# EAGLE board 4brar07_Buck_Boost_Module_With_Led_Matrix (EAGLE 9.6.2)
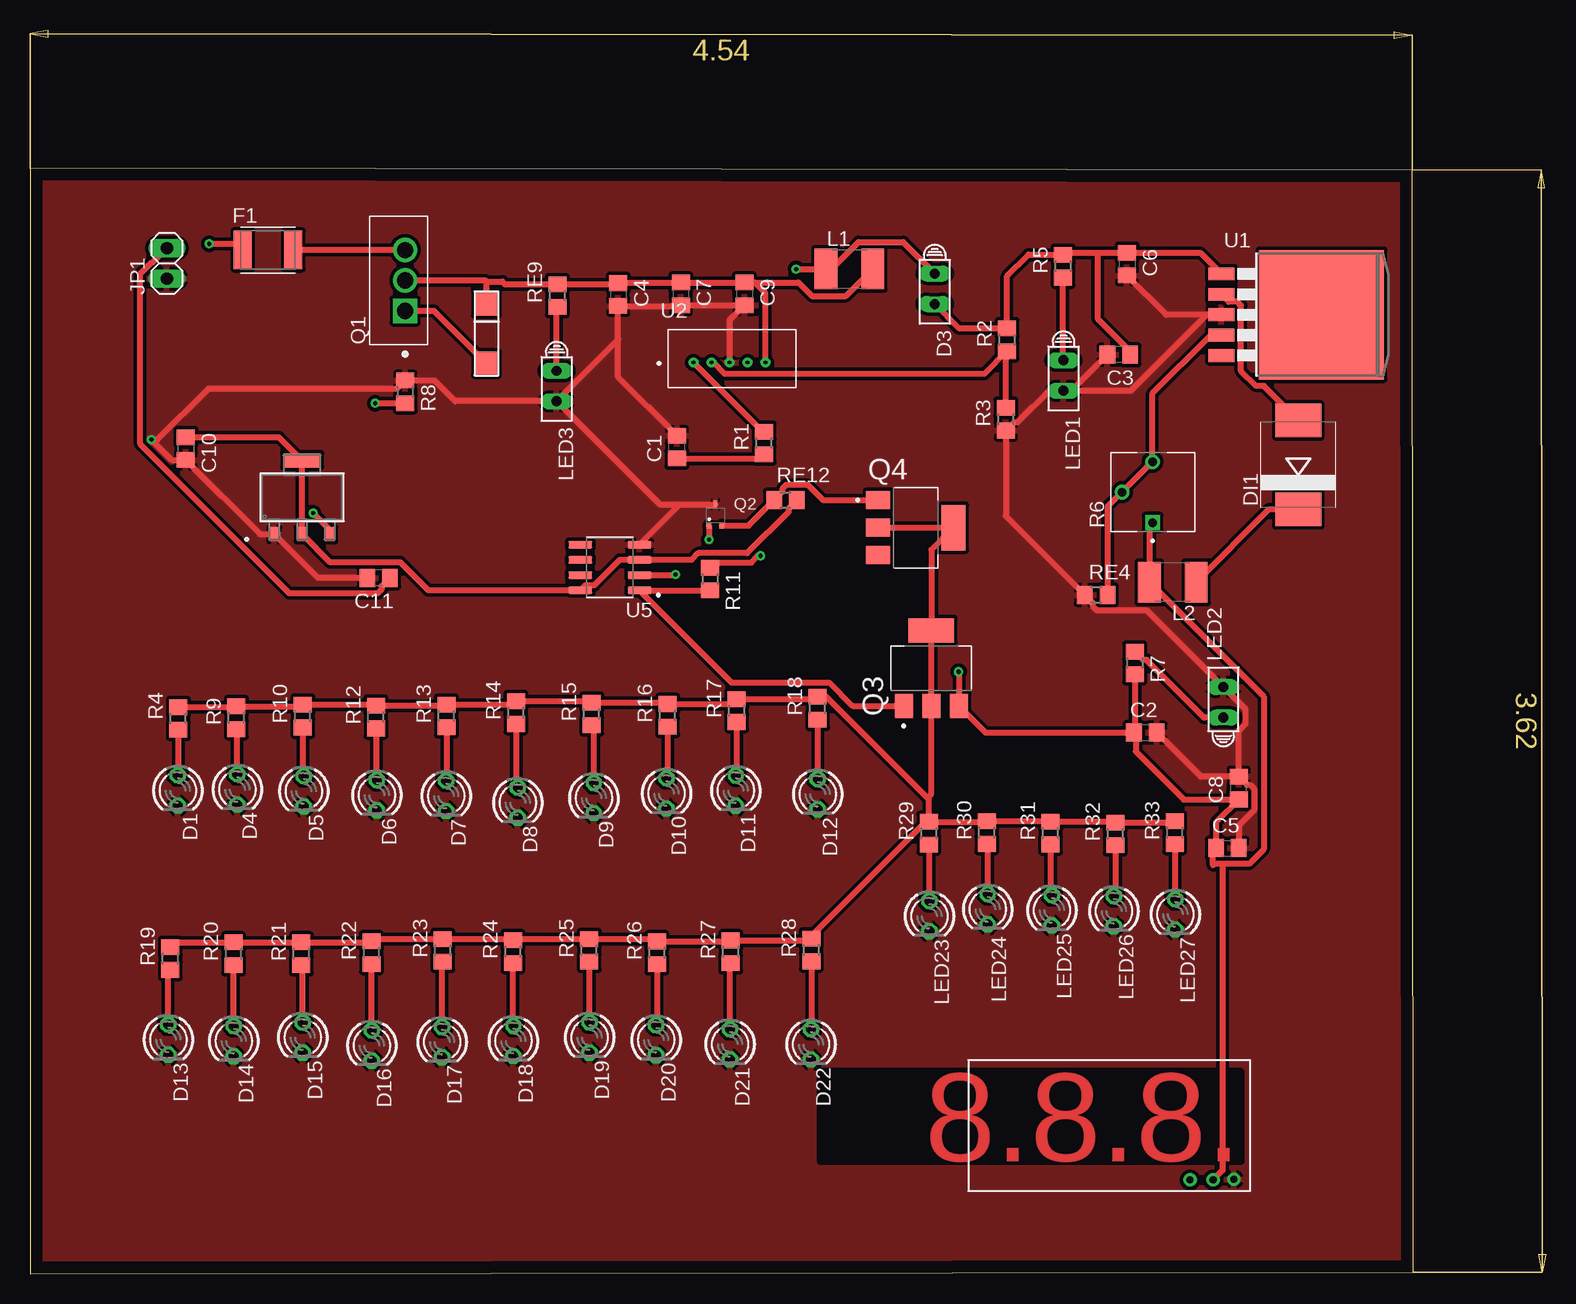
[diagram p0: board, top side]
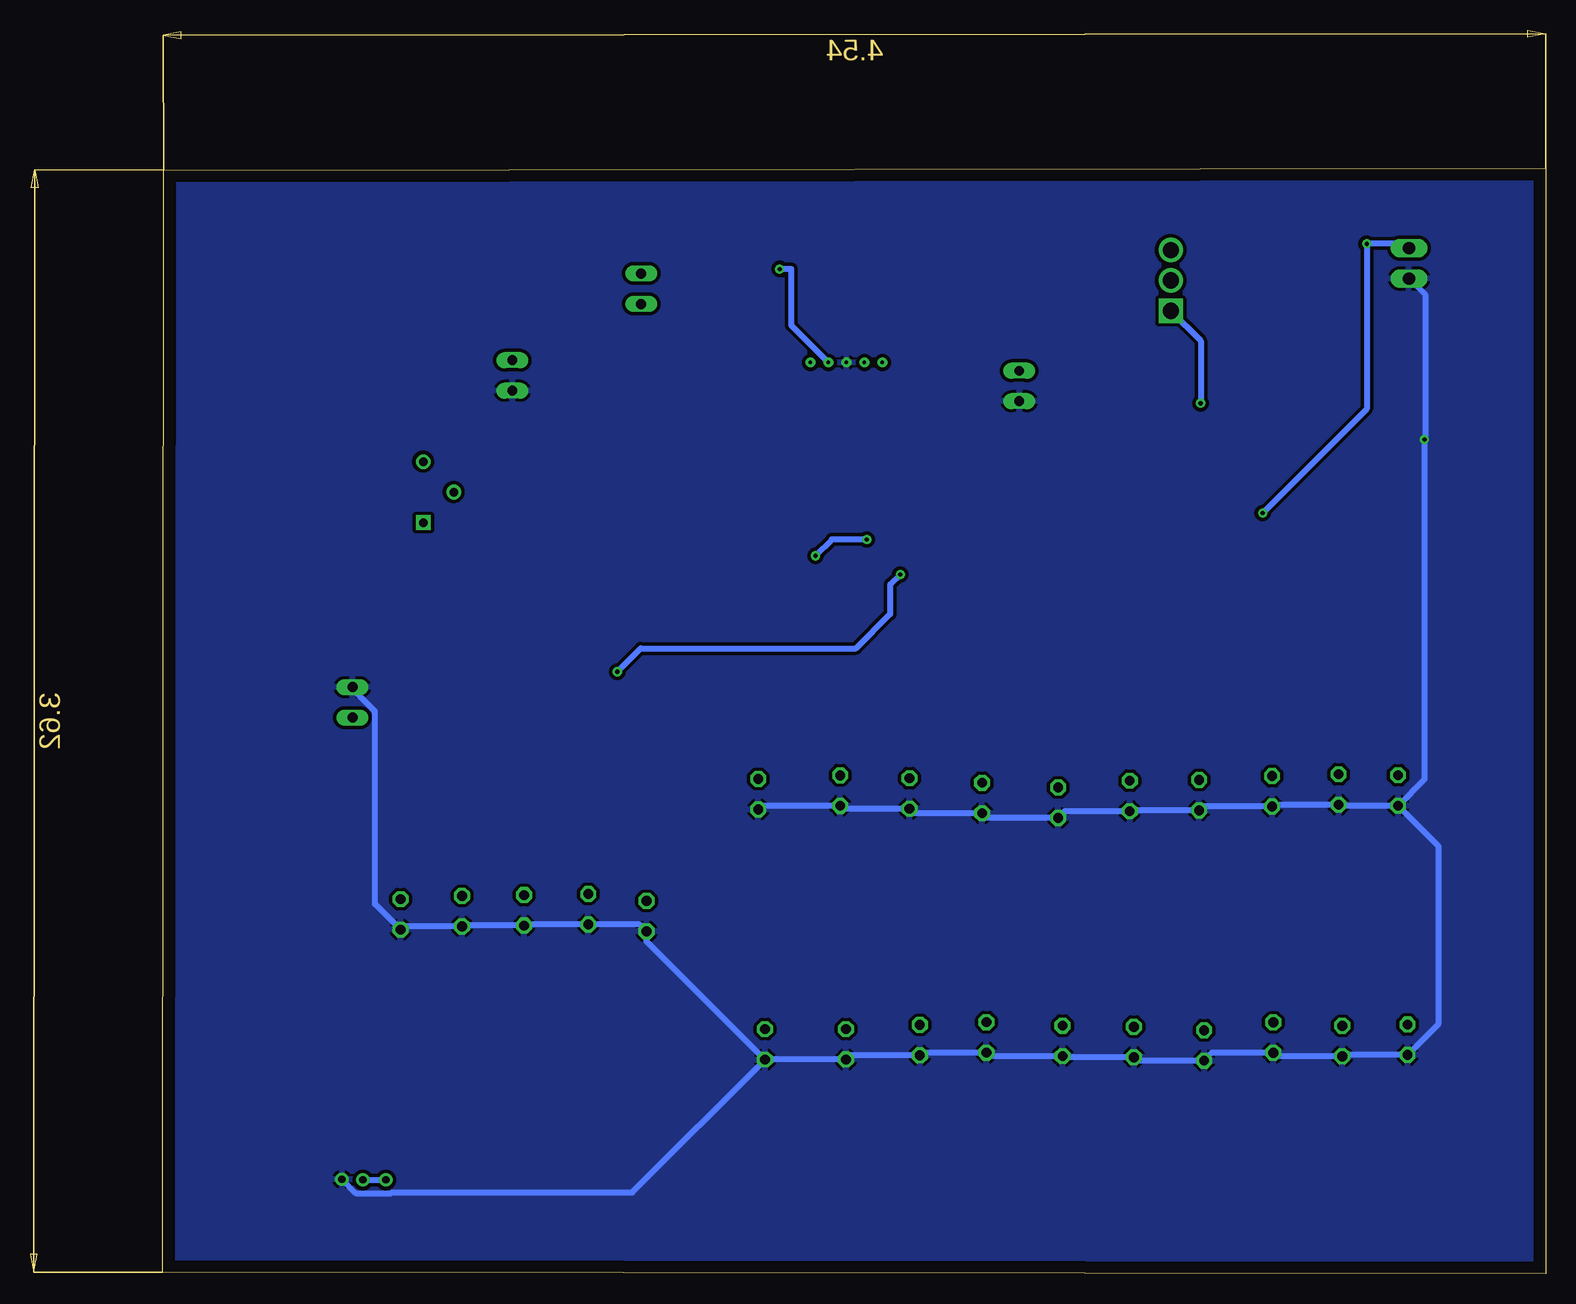
[diagram p1: board, bottom side, seen from below]

Size 115.32 x 92.16 mm. Coordinates in mm from the lower left corner, seen from the top.
Outline: 0,0 115.32,0.13 115.23,92.01 0,92.16 0,0
Copper layers (1*16): Top 0.035mm / dielectric 1.5mm / Bottom 0.035mm
Design rules "default *": minimum track width 6mil, minimum drill 0.3mm, track to track 0.3mm, track to pad 0.3mm, pad to pad 0.3mm, via to via 0.3mm, smd to smd 0.3mm, copper to edge 40mil, drill to drill 6mil, minimum pad ring 10mil, minimum via ring 8mil, stop-mask expansion 4mil, vias tented up to drill 0mil, thermal gap 10mil
Net classes: 0 default: width 0.25 mm, drill 0.3 mm, clearance 0.3 mm; 1 Power: width 0.5 mm, drill 0.3 mm, clearance 0.3 mm

## Footprints (pad centres in the part's own frame; a part is rotated, then mirrored left to right if it is on the bottom)
C0805 = smd 1.3 x 1.5: 1 -0.95,0; 2 0.95,0
LED3MM = drill 0.813 octagon: A -1.27,0; K 1.27,0
HLMP6 = drill 0.813 long: A -1.27,0; K 1.27,0
SMC = smd 2.8 x 3.8: A 3.7,0; C -3.7,0
VOLTMETER = drill 0.6: GND 22.15,0.96; MP 18.49,0.92; VCC 20.41,0.92
FUSER_MF-MSMF010-2 = smd 1.5 x 3.2: 1 -2.1,0; 2 2.1,0
1X02 = drill 1.016 long: 1 -1.27,0; 2 1.27,0
L1812 = smd 1.9 x 3.4: 1 -1.95,0; 2 1.95,0
TO254P1067X483X2286-3 = drill 1.34 square: 1 0,0 | drill 1.34: 2 2.54,0; 3 5.08,0
SOT666 = smd 0.375 x 0.5: 1 -0.537,-0.85; 3 0.538,-0.85 | smd 0.3 x 0.65: 5 0,0.925
SOT230P700X175-4N = smd 2 x 1.5: 1 -3.15,2.3; 2 -3.15,0; 3 -3.15,-2.3 | smd 2 x 3.8: 4 3.15,0
R0805 = smd 1.3 x 1.5: 1 -0.95,0; 2 0.95,0
TRIM_3362P-1-253LF = drill 0.714 square: 1 -2.54,0 | drill 0.714: 2 0,2.54; 3 2.54,0
TO263-5 = smd 1.067 x 2.159: 1 -3.404,-5.791; 2 -1.702,-5.791; 3 0,-5.791; 4 1.702,-5.791; 5 3.404,-5.791 | smd 10.8 x 10.41: 6 0,2.54
VREG_LM2577T-ADJ/NOPB = drill 0.3: P$1 0.18,0.04; P$2 1.68,0.04; P$3 3.18,0.04; P$4 4.68,0.04; P$5 6.18,0.04
SOT223_AMS1117-5.0_ADS-L = smd 0.838 x 1.168: 1 -2.311,-3.068; 2 0,-3.068; 3 2.311,-3.068 | smd 3.099 x 1.168: 4 0,3.068
SOIC127P599X175-8N = smd 1.97 x 0.6: 1 -2.47,1.905; 2 -2.47,0.635; 3 -2.47,-0.635; 4 -2.47,-1.905; 5 2.47,-1.905; 6 2.47,-0.635; 7 2.47,0.635; 8 2.47,1.905
ZMM12 = smd 2 x 2: 1 -2.5,0; 2 2.5,0

## Placement (x,y rotation side)
C1  [C0805]  53.93,68.92 90 top
C2  [C0805]  92.97,45.12 0 top
C3  [C0805]  90.76,76.62 180 top
C4  [C0805]  49.04,81.63 270 top
C5  [C0805]  99.81,35.48 0 top
C6  [C0805]  91.44,84.17 270 top
C7  [C0805]  54.25,81.68 270 top
C8  [C0805]  100.75,40.49 90 top
C9  [C0805]  59.56,81.68 270 top
C10  [C0805]  12.99,68.79 270 top
C11  [C0805]  29.06,58.01 180 top
D1  TLLG4400  [LED3MM]  12.32,40.29 270 top
D3  HLMP6  [HLMP6]  75.42,82.11 270 top
D4  TLLG4400  [LED3MM]  17.28,40.37 270 top
D5  TLLG4400  [LED3MM]  22.82,40.22 270 top
D6  TLLG4400  [LED3MM]  28.91,39.9 270 top
D7  TLLG4400  [LED3MM]  34.69,39.83 270 top
D8  TLLG4400  [LED3MM]  40.66,39.27 270 top
D9  TLLG4400  [LED3MM]  47,39.66 270 top
D10  TLLG4400  [LED3MM]  53.05,40.04 270 top
D11  TLLG4400  [LED3MM]  58.83,40.28 270 top
D12  TLLG4400  [LED3MM]  65.66,39.98 270 top
D13  TLLG4400  [LED3MM]  11.53,19.51 270 top
D14  TLLG4400  [LED3MM]  16.98,19.4 270 top
D15  TLLG4400  [LED3MM]  22.73,19.69 270 top
D16  TLLG4400  [LED3MM]  28.49,19.03 270 top
D17  TLLG4400  [LED3MM]  34.35,19.32 270 top
D18  TLLG4400  [LED3MM]  40.29,19.41 270 top
D19  TLLG4400  [LED3MM]  46.64,19.7 270 top
D20  TLLG4400  [LED3MM]  52.19,19.48 270 top
D21  TLLG4400  [LED3MM]  58.35,19.13 270 top
D22  TLLG4400  [LED3MM]  65.1,19.12 270 top
DI1  SS56SMC  [SMC]  105.73,67.43 90 top
DISP1  VOLTMETER  [VOLTMETER]  78.21,6.91 0 top
F1  MF-MSMF010-2  [FUSER_MF-MSMF010-2]  19.84,85.35 0 top
JP1  [1X02]  11.41,84.24 90 top
L1  [L1812]  68.3,83.77 0 top
L2  [L1812]  95.26,57.65 180 top
LED1  HLMP6  [HLMP6]  86.15,74.89 270 top
LED2  HLMP6  [HLMP6]  99.48,47.64 90 top
LED3  HLMP6  [HLMP6]  43.9,74.01 270 top
LED23  TLLG4400  [LED3MM]  74.97,29.81 270 top
LED24  TLLG4400  [LED3MM]  79.83,30.39 270 top
LED25  TLLG4400  [LED3MM]  85.18,30.3 270 top
LED26  TLLG4400  [LED3MM]  90.35,30.23 270 top
LED27  TLLG4400  [LED3MM]  95.47,29.96 270 top
Q1  FQP47P06  [TO254P1067X483X2286-3]  31.27,80.27 90 top
Q2  BC847BV_115  [SOT666]  57.14,63.21 0 top
Q3  NTF5P03T3G  [SOT230P700X175-4N]  75.14,50.49 90 top
Q4  NTF5P03T3G  [SOT230P700X175-4N]  73.84,62.2 0 top
R1  [R0805]  61.19,69.25 90 top
R2  [R0805]  81.45,77.86 90 top
R3  [R0805]  81.35,71.24 90 top
R4  [R0805]  12.36,46.29 90 top
R5  [R0805]  86.12,83.99 90 top
R6  3362P-1-253LF  [TRIM_3362P-1-253LF]  93.58,65.16 90 top
R7  [R0805]  92.09,50.92 270 top
R8  [R0805]  31.28,73.52 270 top
R9  [R0805]  17.2,46.36 90 top
R10  [R0805]  22.73,46.49 90 top
R11  [R0805]  56.68,57.92 270 top
R12  [R0805]  28.84,46.41 90 top
R13  [R0805]  34.71,46.5 90 top
R14  [R0805]  40.51,46.78 90 top
R15  [R0805]  46.82,46.67 90 top
R16  [R0805]  53.15,46.55 90 top
R17  [R0805]  58.91,46.95 90 top
R18  [R0805]  65.65,47.14 90 top
R19  [R0805]  11.7,26.28 90 top
R20  [R0805]  16.97,26.68 90 top
R21  [R0805]  22.62,26.68 90 top
R22  [R0805]  28.47,26.77 90 top
R23  [R0805]  34.41,26.96 90 top
R24  [R0805]  40.26,26.86 90 top
R25  [R0805]  46.61,26.96 90 top
R26  [R0805]  52.27,26.76 90 top
R27  [R0805]  58.41,26.84 90 top
R28  [R0805]  65.14,26.99 90 top
R29  [R0805]  74.93,36.73 90 top
R30  [R0805]  79.76,36.78 90 top
R31  [R0805]  85.07,36.74 90 top
R32  [R0805]  90.47,36.67 90 top
R33  [R0805]  95.43,36.77 90 top
RE4  [R0805]  88.87,56.6 0 top
RE9  [R0805]  43.97,81.54 90 top
RE12  [R0805]  62.98,64.49 0 top
U1  LM2596S  [TO263-5]  105.11,79.95 270 top
U2  LM2577T-ADJ  [VREG_LM2577T-ADJ/NOPB]  55.13,75.93 0 top
U4  AMS1117-5.0SOT223_AMS1117-5.0_ADS-L  [SOT223_AMS1117-5.0_ADS-L]  22.68,64.73 0 top
U5  LM358DR  [SOIC127P599X175-8N]  48.34,58.88 180 top
U$1  ZMM12  [ZMM12]  38.06,78.38 90 top

## Library data of the parts
C1-C11 = rcl; SPICEPREFIX: C
D1 D4-D22 LED23-LED27 = led; MF: VISHAY SEMICONDUCTOR; OC_FARNELL: 1612435
D3 LED1-LED3 = display-hp; MF: AGILENT TECHNOLOGIES; MPN: HLMP-6500; OC_FARNELL: 1652490; OC_NEWARK: 40K0088
DI1 = SS56; AVAILABILITY: In Stock; CHECK_PRICES: https://www.snapeda.com/parts/SS56/MDD/view-part/?ref=eda; DESCRIPTION: Diode Schottky 60 V 5A Surface Mount SMA; MF: MDD; MP: SS56; PACKAGE: None; PRICE: None; SNAPEDA_LINK: https://www.snapeda.com/parts/SS56/MDD/view-part/?ref=snap
DISP1 = voltmeter; DISP1: DISP1
F1 = MF-MSMF010-2; AVAILABILITY: In Stock; CHECK_PRICES: https://www.snapeda.com/parts/MF-MSMF010-2/Bourns/view-part/?ref=eda; DESCRIPTION: Fuse Resettable 40A Sz 4532 0.186x0.134x0.043 SMT 60VDC DCR 0.7 Ohms PCB | Bourns MF-MSMF010-2; MF: Bourns; MP: MF-MSMF010-2; PACKAGE: 1812 Bourns; PRICE: None; SNAPEDA_LINK: https://www.snapeda.com/parts/MF-MSMF010-2/Bourns/view-part/?ref=snap
JP1 = pinhead
L1 L2 = rcl; SPICEPREFIX: L
Q1 = FQP47P06; AVAILABILITY: In Stock; CHECK_PRICES: https://www.snapeda.com/parts/FQP47P06/Onsemi/view-part/?ref=eda; DESCRIPTION: P-Channel 60 V 47A (Tc) 160W (Tc) Through Hole TO-220-3; MF: ON Semiconductor; MP: FQP47P06; PACKAGE: TO-220-3 ON; PRICE: None; SNAPEDA_LINK: https://www.snapeda.com/parts/FQP47P06/Onsemi/view-part/?ref=snap
Q2 = BC847BV_115
Q3 Q4 = NTF5P03T3G
R1-R5 R7-R33 RE4 RE9 RE12 = rcl; SPICEPREFIX: R
R6 = 3362P-1-253LF; AVAILABILITY: In Stock; CHECK_PRICES: https://www.snapeda.com/parts/3362P-1-253LF/Bourns/view-part/?ref=eda; DESCRIPTION: 1/4 Sq, Thru-Hole, TRIMMER, 25 Kilohms, Cermet, Single Turn | Bourns 3362P-1-253LF; MF: Bourns; MP: 3362P-1-253LF; PACKAGE: 3362P-1 Bourns Inc.; PRICE: None; SNAPEDA_LINK: https://www.snapeda.com/parts/3362P-1-253LF/Bourns/view-part/?ref=snap
U1 = national-semiconductor; MF: NATIONAL SEMICONDUCTOR; MPN: LM2596S-ADJ/NOPB; OC_FARNELL: 9494367; OC_NEWARK: 41K3842
U2 = LM2577T-ADJ_NOPB
U4 = AMS1117-5.0; COPYRIGHT: Copyright (C) 2025 Ultra Librarian. All rights reserved.; MANUFACTURER_NAME: Advanced Monolithic Systems; MANUFACTURER_PART_NUMBER: AMS1117-5.0
U5 = LM358DR; AVAILABILITY: In Stock; CHECK_PRICES: https://www.snapeda.com/parts/LM358DR/Rohm/view-part/?ref=eda; DESCRIPTION: Standard (General Purpose) Amplifier 2 Circuit 8-SOIC; MF: Rohm Semiconductor; MP: LM358DR; PACKAGE: None; PRICE: None; SNAPEDA_LINK: https://www.snapeda.com/parts/LM358DR/Rohm/view-part/?ref=snap
U$1 = ZMM12

## Nets
4: D3.A L1.1 U2.P$4
+5V [Power]: C10.1 RE12.2 U4.2 U4.4 U5.3 U5.8
FINAL [Power]: Q3.2 Q3.4 Q4.2 Q4.4 R4.2 R9.2 R10.2 R12.2 R13.2 R14.2 R15.2 R16.2 R17.2 R18.2 R19.2 R20.2 R21.2 R22.2 R23.2 R24.2 R25.2 R26.2 R27.2 R28.2 R29.2 R30.2 R31.2 R32.2 R33.2
GND [Power]: C1.2 C2.2 C3.2 C4.2 C5.2 C6.2 C7.2 C8.2 C9.2 C10.2 C11.2 D1.K D4.K D5.K D6.K D7.K D8.K D9.K D10.K D11.K D12.K D13.K D14.K D15.K D16.K D17.K D18.K D19.K D20.K D21.K D22.K DISP1.GND JP1.1 LED1.K LED2.K LED3.K LED23.K LED24.K LED25.K LED26.K LED27.K Q2.5 R3.1 R8.1 RE4.1 U1.3 U2.P$3 U4.1 U5.4
N$1: D1.A R4.1
N$2: F1.2 Q1.3
N$3: C4.1 C7.1 C9.1 L1.2 Q1.2 RE9.2 U2.P$5 U$1.2
N$4: Q1.1 R8.2 U$1.1
N$5: D4.A R9.1
N$6: LED3.A RE9.1
N$7: C3.1 C6.1 D3.K R2.2 R5.2 U1.1
N$8: C1.1 R1.1
N$9: R1.2 U2.P$1
N$11: D5.A R10.1
N$12: D22.A R28.1
N$13: LED1.A R5.1
N$14: D21.A R27.1
N$15: Q2.1 R11.1
N$16: D20.A R26.1
N$17: Q2.3 Q4.1 RE12.1
N$18: DI1.A U1.2
N$19: DI1.C L2.1
N$20: D19.A R25.1
N$21: R6.2 R6.3 RE4.2 U1.4
N$22: LED2.A R7.1
N$23: D18.A R24.1
N$24: Q3.1 R11.2 U5.1
N$25: D6.A R12.1
N$26: LED23.A R29.1
N$27: LED24.A R30.1
N$28: LED25.A R31.1
N$29: LED26.A R32.1
N$30: LED27.A R33.1
N$31: D17.A R23.1
N$32: D16.A R22.1
N$33: D15.A R21.1
N$34: D14.A R20.1
N$35: D13.A R19.1
N$36: D7.A R13.1
N$38: D12.A R18.1
N$39: D11.A R17.1
N$40: D10.A R16.1
N$41: D9.A R15.1
N$42: D8.A R14.1
N$43: R2.1 R3.2 U2.P$2
OUT: C2.1 C5.1 C8.1 DISP1.MP DISP1.VCC L2.2 Q3.3 R6.1 R7.2 U5.2
VCC [Power]: C11.1 F1.1 JP1.2 U4.3

## Tracks (layer width: path | path; a pad name or v marks a point on that pad's centre or on a via)
4  (via drill 0.35)
  Top 0.5: D3.A 72.78,86.02 69.07,86.02 66.82,83.77 L1.1 v63.87,83.76
  Bottom 0.5: U2.P$4 62.89,79.05 62.89,83.76 v63.87,83.76
+5V
  Top 0.5: C10.1 20.74,69.74 U4.4 U4.2 25.03,59.31 30.89,59.31 33.22,56.98 U5.8 46.29,57.4 47.04,57.4 49.16,59.52 U5.3 55.15,59.52 55.7,60.07 59.79,60.07 63.23,63.51 63.23,63.79 RE12.2
FINAL
  Top 0.5: R29.2 79.71,37.68 R30.2 85.03,37.73 R31.2 90.4,37.69 R32.2 95.33,37.62 R33.2 | R19.2 12.1,27.63 R20.2 R21.2 28.38,27.63 R22.2 28.66,27.91 R23.2 40.16,27.91 R24.2 40.36,27.91 R25.2 52.07,27.91 R26.2 58.33,27.71 R27.2 64.99,27.79 R28.2 65.14,28.17 74.65,37.68 R29.2 | R4.2 17.13,47.24 R9.2 22.6,47.31 R10.2 28.76,47.44 R12.2 34.62,47.36 R13.2 40.23,47.45 R14.2 46.71,47.73 R15.2 53.03,47.62 R16.2 58.51,47.5 R17.2 65.46,47.9 R18.2 65.76,48.2 66.27,48.2 74.93,39.54 R29.2 | R29.2 74.93,39.79 75.14,40 Q3.2 Q3.4 75.14,60.35 Q4.4 Q4.2
GND  (via drill 0.35)
  Top 0.5: C11.2 24.02,58.01 U4.1 19.17,61.66 C10.2 11.82,67.84 v10.12,69.54 10.61,69.54 14.84,73.77 30.58,73.77 R8.1 33.72,74.47 35.45,72.74 LED3.K | C5.2 100.76,37.37 102.05,38.66 102.05,40.42 101.73,40.74 101.45,40.74 C8.2 | LED1.K 86.09,73.68 85.02,73.68 82.33,70.99 82.05,70.99 R3.1 81.35,63.17 RE4.1 88.62,55.9 88.62,55.62 88.94,55.3 93.09,55.3 LED2.K 101.35,47.04 101.35,45.87 100.75,45.27 C8.2 | U1.3 98.1,79.95 | 98.1,79.95 94.71,79.95 C6.2 | C3.2 86.81,73.62 LED1.K | LED1.K 91.77,73.62 98.1,79.95 | LED3.K 49.04,77.88 | 49.04,77.88 C4.2 54.2,80.68 C7.2 C9.2 58.31,79.48 U2.P$3 | C1.2 49.04,74.76 49.04,77.88 | U5.4 54.16,64.14 | C8.2 97.6,41.44 C2.2 | LED3.K 52.51,64.14 54.16,64.14 | 54.16,64.14 Q2.5
  Bottom 0.5: JP1.1 10.07,81.63 10.07,69.54 v10.12,69.54 10.12,41.22 D1.K | D1.K 17.2,39.02 D4.K 22.67,39.1 D5.K 28.59,38.95 D6.K 34.62,38.63 D7.K 40.1,38.56 D8.K 46.61,38 D9.K 52.67,38.39 D10.K 58.59,38.77 D11.K 65.36,39.01 D12.K | D22.K D21.K 58,18.21 D20.K 51.97,18.43 D19.K 46.35,18.14 D18.K 40.2,18.05 D17.K 34.06,17.76 D16.K 27.83,18.42 D15.K 22.44,18.13 D14.K 16.87,18.24 D13.K 8.98,20.79 8.98,35.68 D1.K | D22.K 74.97,27.72 LED23.K 75.55,29.12 LED24.K 85.09,29.12 LED25.K 90.28,29.03 LED26.K 95.2,28.96 LED27.K 97.61,30.83 97.61,46.87 99.48,48.74 LED2.K | DISP1.GND 99.22,6.73 96.24,6.73 96.18,6.79 76.16,6.79 D22.K
  pour Bottom: 0.07,-0.07 115.39,-0.07 115.39,91.88 0.07,91.88
  pour Top: 0.07,-0.07 115.39,-0.07 115.39,91.88 0.07,91.88
N$1
  Top 0.5: R4.1 12.36,41.6 D1.A
N$2
  Top 0.5: Q1.3 F1.2
N$3
  Top 0.5: U2.P$5 61.31,81.74 60.42,82.63 C9.1 | C9.1 C7.1 54.2,82.58 C4.1 48.95,82.49 RE9.2 39.59,82.49 39.36,82.72 38.06,82.72 | Q1.2 37.97,82.81 38.06,82.72 | C9.1 64.06,82.63 65.17,81.52 68,81.52 L1.2 | U$1.2 38.06,82.72
N$4  (via drill 0.35)
  Top 0.5: v28.78,72.57 R8.2 | U$1.1 33.67,80.27 Q1.1
  Bottom 0.5: Q1.1 28.78,77.78 v28.78,72.57
N$5
  Top 0.5: D4.A 17.28,45.33 R9.1
N$6
  Top 0.5: LED3.A 43.9,80.52 RE9.1
N$7
  Top 0.5: D3.K 77.45,78.81 R2.2 81.45,83.16 83.25,84.96 86.1,84.96 R5.2 86.3,85.12 89.03,85.12 | 89.03,85.12 C6.1 97.55,85.12 U1.1 | C3.1 91.65,76.68 91.65,76.96 89.03,79.58 89.03,85.12
N$8
  Top 0.5: C1.1 60.86,67.97 R1.1
N$9
  Top 0.5: U2.P$1 61.08,70.2 R1.2
N$11
  Top 0.5: R10.1 22.73,41.58 D5.A
N$12
  Top 0.5: R28.1 65.14,20.43 D22.A
N$13
  Top 0.5: LED1.A 86.12,76.19 R5.1
N$14
  Top 0.5: D21.A 58.35,25.83 R27.1
N$15  (via drill 0.35)
  Top 0.5: Q2.1 v56.6,61.22 v56.61,61.21 | v60.88,59.85 60.7,59.85 60.12,59.27 57.08,59.27 R11.1
  Bottom 0.5: v56.61,61.21 59.53,61.21 v60.88,59.85
N$16
  Top 0.5: R26.1 52.27,20.83 D20.A
N$17
  Top 0.5: Q4.1 66.1,64.5 64.81,65.79 63.05,65.79 62.73,65.47 62.73,65.19 RE12.1 59.9,62.36 Q2.3
N$18
  Top 0.5: U1.2 99.94,81.03 100.63,81.03 100.95,80.71 100.95,75.27 102.22,74 102.86,74 DI1.A
N$19
  Top 0.5: L2.1 103.29,63.73 DI1.C
N$20
  Top 0.5: D19.A 46.64,25.98 R25.1
N$21
  Top 0.5: RE4.2 89.82,63.94 R6.2 R6.3 93.58,73.4 98.32,78.14 99.21,78.14 U1.4
N$22
  Top 0.5: R7.1 92.79,51.17 93.07,51.17 97.87,46.37 LED2.A
N$23
  Top 0.5: D18.A 40.29,25.88 R24.1
N$24
  Top 0.5: R11.2 U5.1 58.49,49.29 66.63,49.29 68.58,47.34 Q3.1
N$25
  Top 0.5: R12.1 28.84,41.24 D6.A
N$26
  Top 0.5: LED23.A 74.97,35.74 R29.1
N$27
  Top 0.5: R30.1 79.83,35.76 LED24.A
N$28
  Top 0.5: R31.1 85.07,31.68 LED25.A
N$29
  Top 0.5: R32.1 90.47,31.62 LED26.A
N$30
  Top 0.5: R33.1 95.43,31.27 LED27.A
N$31
  Top 0.5: D17.A 34.35,25.95 R23.1
N$32
  Top 0.5: D16.A 28.49,25.8 R22.1
N$33
  Top 0.5: D15.A 22.73,25.62 R21.1
N$34
  Top 0.5: D14.A R20.1
N$35
  Top 0.5: D13.A 11.53,25.16 R19.1
N$36
  Top 0.5: R13.1 34.71,41.12 D7.A
N$38
  Top 0.5: R18.1 D12.A
N$39
  Top 0.5: R17.1 58.91,41.63 D11.A
N$40
  Top 0.5: R16.1 53.15,41.41 D10.A
N$41
  Top 0.5: D9.A 47,45.54 R15.1
N$42
  Top 0.5: R14.1 40.51,40.69 D8.A
N$43
  Top 0.5: R3.2 81.35,76.81 R2.1 79.56,75.02 57.91,75.02 56.96,75.97 U2.P$2
OUT  (via drill 0.35)
  Top 0.5: 99.4,34.18 99.4,8.61 DISP1.VCC | C2.1 92.17,44.97 92.17,43.55 96.18,39.54 C8.1 98.86,37.65 C5.1 98.62,35.24 98.62,34.08 98.72,34.18 99.4,34.18 | C2.1 79.66,45.12 Q3.3 77.44,50.16 v77.41,50.19 | U5.2 53.77,58.24 v53.82,58.3 | 99.4,34.18 101.64,34.18 102.85,35.39 102.85,48.11 L2.2 93.31,62.35 R6.1 | R7.2 92.09,45.19 C2.1
  Bottom 0.5: DISP1.VCC DISP1.MP | v53.82,58.3 54.66,57.46 54.66,54.98 57.51,52.13 75.45,52.13 77.39,50.19 v77.41,50.19
VCC  (via drill 0.35)
  Top 0.5: v14.94,85.86 17.23,85.86 F1.1 | JP1.2 10.18,84.28 10.11,84.28 9.19,83.37 9.19,69.16 21.64,56.71 28.99,56.71 29.31,57.03 29.31,57.31 C11.1 | v23.61,63.42 24.99,62.04 U4.3
  Bottom 0.5: JP1.2 11.76,85.86 v14.94,85.86 14.94,72.09 v23.61,63.42